# Allegro board pc049a_toplevel_40_a16-6_v2.brd
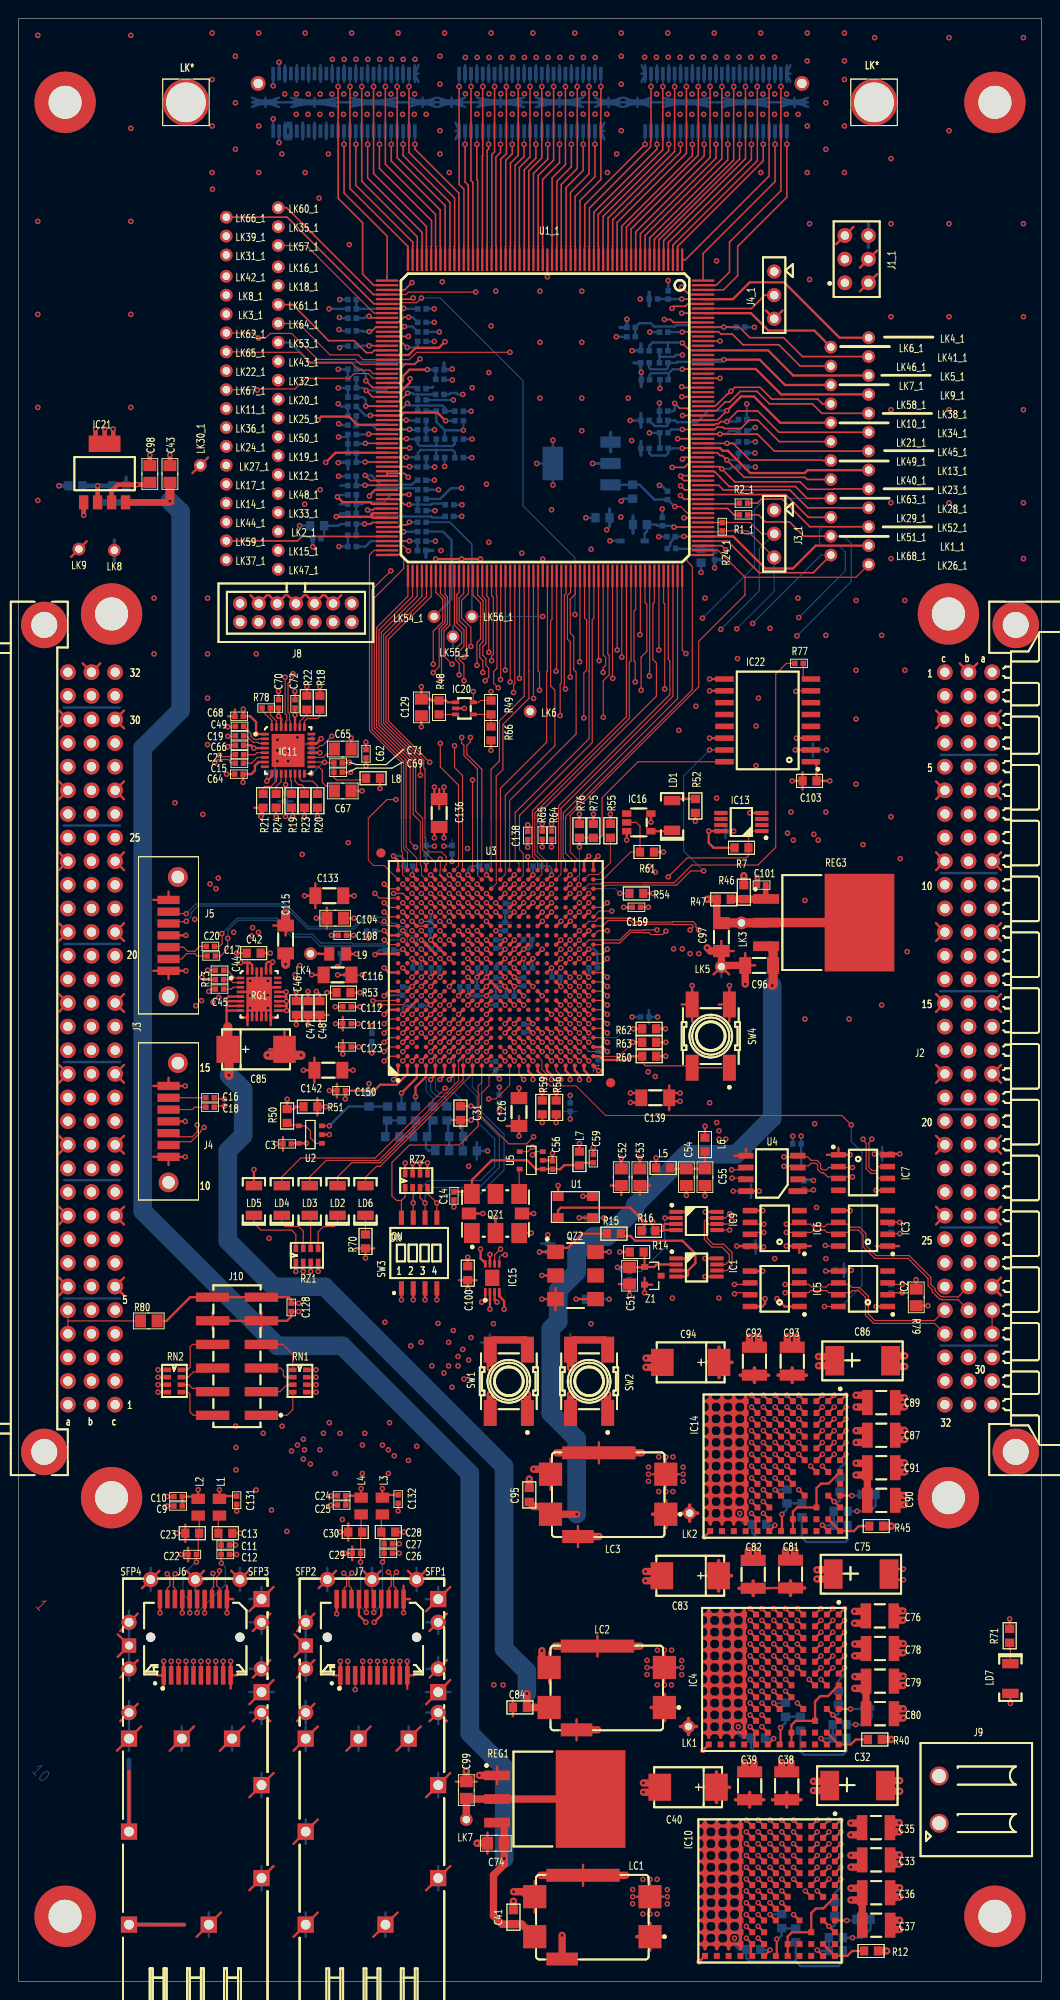
[diagram p0: board, top side]
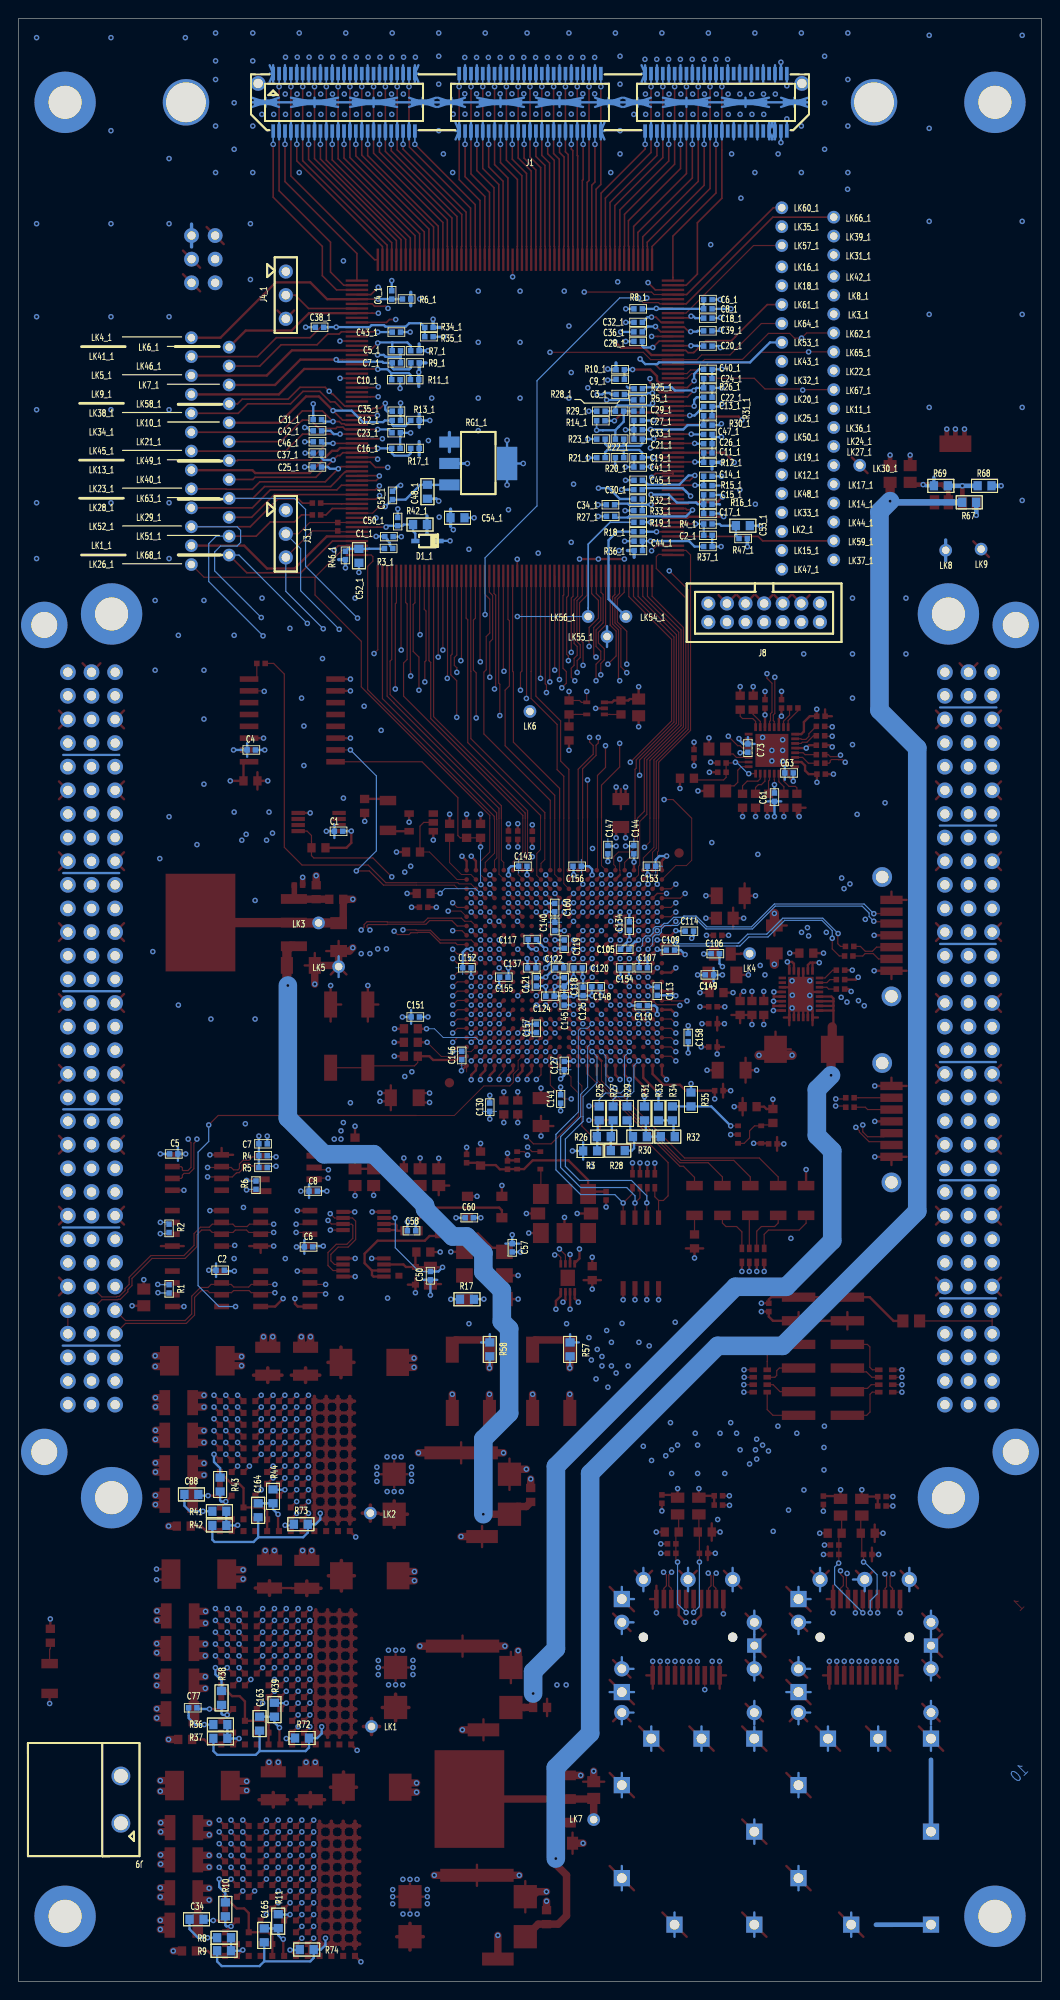
[diagram p1: board, bottom side, seen from below]

Outline 110 x 211 mm; copper layers: TOP, L2, L3, L4, L5, L6, L7, L8, L9, BOTTOM. Coordinates in mm from the lower left corner of the outline.
Outline path: 0,211 110,211 110,0 0,0 0,211

## Design rules (mm)
net group CLK_125M_PLLREF: nets CLK_125M_PLLREF_N CLK_125M_PLLREF_P
net group FPGA_PLL_REF_CLK101: nets FPGA_PLL_REF_CLK101_N FPGA_PLL_REF_CLK101_P
net group FPGA_PLL_REF_CLK123: nets FPGA_PLL_REF_CLK123_N FPGA_PLL_REF_CLK123_P
net group LVDS_DLEFT0: nets LVDS_DLEFT_N<0> LVDS_DLEFT_P<0>
net group LVDS_DLEFT1: nets LVDS_DLEFT_N<1> LVDS_DLEFT_P<1>
net group LVDS_DLEFT2: nets LVDS_DLEFT_N<2> LVDS_DLEFT_P<2>
net group LVDS_DLEFT3: nets LVDS_DLEFT_N<3> LVDS_DLEFT_P<3>
net group LVDS_DLEFT4: nets LVDS_DLEFT_N<4> LVDS_DLEFT_P<4>
net group LVDS_DLEFT5: nets LVDS_DLEFT_N<5> LVDS_DLEFT_P<5>
net group LVDS_DLEFT6: nets LVDS_DLEFT_N<6> LVDS_DLEFT_P<6>
net group LVDS_DLEFT7: nets LVDS_DLEFT_N<7> LVDS_DLEFT_P<7>
net group LVDS_DLEFT8: nets LVDS_DLEFT_N<8> LVDS_DLEFT_P<8>
net group LVDS_DLEFT9: nets LVDS_DLEFT_N<9> LVDS_DLEFT_P<9>
net group LVDS_DLEFT10: nets LVDS_DLEFT_N<10> LVDS_DLEFT_P<10>
net group LVDS_DLEFT11: nets LVDS_DLEFT_N<11> LVDS_DLEFT_P<11>
net group LVDS_DLEFT12: nets LVDS_DLEFT_N<12> LVDS_DLEFT_P<12>
net group LVDS_DLEFT13: nets LVDS_DLEFT_N<13> LVDS_DLEFT_P<13>
net group LVDS_DLEFT14: nets LVDS_DLEFT_N<14> LVDS_DLEFT_P<14>
net group LVDS_DLEFT15: nets LVDS_DLEFT_N<15> LVDS_DLEFT_P<15>
net group LVDS_DLEFT_CLK: nets LVDS_DLEFT_CLK_N LVDS_DLEFT_CLK_P
net group LVDS_DRIGHT0: nets LVDS_DRIGHT_N<0> LVDS_DRIGHT_P<0>
net group LVDS_DRIGHT1: nets LVDS_DRIGHT_N<1> LVDS_DRIGHT_P<1>
net group LVDS_DRIGHT2: nets LVDS_DRIGHT_N<2> LVDS_DRIGHT_P<2>
net group LVDS_DRIGHT3: nets LVDS_DRIGHT_N<3> LVDS_DRIGHT_P<3>
net group LVDS_DRIGHT4: nets LVDS_DRIGHT_N<4> LVDS_DRIGHT_P<4>
net group LVDS_DRIGHT5: nets LVDS_DRIGHT_N<5> LVDS_DRIGHT_P<5>
net group LVDS_DRIGHT6: nets LVDS_DRIGHT_N<6> LVDS_DRIGHT_P<6>
net group LVDS_DRIGHT7: nets LVDS_DRIGHT_N<7> LVDS_DRIGHT_P<7>
net group LVDS_DRIGHT8: nets LVDS_DRIGHT_N<8> LVDS_DRIGHT_P<8>
net group LVDS_DRIGHT9: nets LVDS_DRIGHT_N<9> LVDS_DRIGHT_P<9>
net group LVDS_DRIGHT10: nets LVDS_DRIGHT_N<10> LVDS_DRIGHT_P<10>
net group LVDS_DRIGHT11: nets LVDS_DRIGHT_N<11> LVDS_DRIGHT_P<11>
net group LVDS_DRIGHT12: nets LVDS_DRIGHT_N<12> LVDS_DRIGHT_P<12>
net group LVDS_DRIGHT13: nets LVDS_DRIGHT_N<13> LVDS_DRIGHT_P<13>
net group LVDS_DRIGHT14: nets LVDS_DRIGHT_N<14> LVDS_DRIGHT_P<14>
net group LVDS_DRIGHT15: nets LVDS_DRIGHT_N<15> LVDS_DRIGHT_P<15>
net group LVDS_DRIGHT_CLK: nets LVDS_DRIGHT_CLK_N LVDS_DRIGHT_CLK_P
net group LVDS_GCLK_FROM_FPGA: nets LVDS_GCLK_FROM_FPGA_N LVDS_GCLK_FROM_FPGA_P
net group LVDS_GCLK_TO_FPGA: nets LVDS_GCLK_TO_FPGA_N LVDS_GCLK_TO_FPGA_P
net group LVDS_GLOBALTRIG_FROM_FPGA: nets LVDS_GLOBALTRIG_FROM_FPGA_N LVDS_GLOBALTRIG_FROM_FPGA_P
net group LVDS_GLOBALTRIG_TO_FPGA: nets LVDS_GLOBALTRIG_TO_FPGA_N LVDS_GLOBALTRIG_TO_FPGA_P
net group LVDS_OTRIG_FROM_FPGA: nets LVDS_OTRIG_FROM_FPGA_N LVDS_OTRIG_FROM_FPGA_P
net group LVDS_OTRIG_TO_FPGA: nets LVDS_OTRIG_TO_FPGA_N LVDS_OTRIG_TO_FPGA_P
net group LVPECL_OTRIG_IN: nets LVPECL_OTRIG_IN_N LVPECL_OTRIG_IN_P
net group LVPECL_OTRIG_OUT: nets LVPECL_OTRIG_OUT_N LVPECL_OTRIG_OUT_P
net group MLVDS_GCLK: nets MLVDS_GCLK_N MLVDS_GCLK_P
net group MLVDS_GLOBALTRIG: nets MLVDS_GLOBALTRIG_N MLVDS_GLOBALTRIG_P
net group OR: nets OR<0> OR<1>
net group SATA_MRX: nets SATA_MRX_N SATA_MRX_P
net group SATA_MTX: nets SATA_MTX_N SATA_MTX_P
net group SATA_SRX: nets SATA_SRX_N SATA_SRX_P
net group SATA_STX: nets SATA_STX_N SATA_STX_P
net group SFP0_RX: nets SFP0_RX_N SFP0_RX_P
net group SFP0_TX: nets SFP0_TX_N SFP0_TX_P
net group SFP1_RX: nets SFP1_RX_N SFP1_RX_P
net group SFP1_TX: nets SFP1_TX_N SFP1_TX_P
net group SFP_CLK: nets SFP_CLK_N SFP_CLK_P
net group SFP_LOS: nets SFP0_LOS SFP1_LOS
net group SFP_MOD_DEF0: nets SFP0_MOD_DEF0 SFP1_MOD_DEF0
net group SFP_MOD_DEF1: nets SFP0_MOD_DEF1 SFP1_MOD_DEF1
net group SFP_MODE_DEF2: nets SFP0_MOD_DEF2 SFP1_MOD_DEF2
net group SFP_RATE_SELECT: nets SFP0_RATE_SELECT SFP1_RATE_SELECT
net group SFP_TX_DISABLE: nets SFP0_TX_DISABLE SFP1_TX_DISABLE
net group SFP_TX_FAULT: nets SFP0_TX_FAULT SFP1_TX_FAULT
net group SI57X_CLK: nets SI57X_CLK_N SI57X_CLK_P
net group ANALOG_TO_MAROC: nets ANALOG_TO_MAROC<0> ANALOG_TO_MAROC<1> ANALOG_TO_MAROC<2> ANALOG_TO_MAROC<3> ANALOG_TO_MAROC<4> ANALOG_TO_MAROC<5> ANALOG_TO_MAROC<6> ANALOG_TO_MAROC<7> ANALOG_TO_MAROC<8> ANALOG_TO_MAROC<9> ANALOG_TO_MAROC<10> ANALOG_TO_MAROC<11> ANALOG_TO_MAROC<12> ANALOG_TO_MAROC<13> ANALOG_TO_MAROC<14> ANALOG_TO_MAROC<15> ANALOG_TO_MAROC<16> ANALOG_TO_MAROC<17> ANALOG_TO_MAROC<18> ANALOG_TO_MAROC<19> ANALOG_TO_MAROC<20> ANALOG_TO_MAROC<21> ANALOG_TO_MAROC<22> ANALOG_TO_MAROC<23> ANALOG_TO_MAROC<24> ANALOG_TO_MAROC<25> ANALOG_TO_MAROC<26> ANALOG_TO_MAROC<27> ANALOG_TO_MAROC<28> ANALOG_TO_MAROC<29> ANALOG_TO_MAROC<30> ANALOG_TO_MAROC<31> ANALOG_TO_MAROC<32> ANALOG_TO_MAROC<33> ANALOG_TO_MAROC<34> ANALOG_TO_MAROC<35> ANALOG_TO_MAROC<36> ANALOG_TO_MAROC<37> ANALOG_TO_MAROC<38> ANALOG_TO_MAROC<39> ANALOG_TO_MAROC<40> ANALOG_TO_MAROC<41> ANALOG_TO_MAROC<42> ANALOG_TO_MAROC<43> ANALOG_TO_MAROC<44> ANALOG_TO_MAROC<45> ANALOG_TO_MAROC<46> ANALOG_TO_MAROC<47> ANALOG_TO_MAROC<48> ANALOG_TO_MAROC<49> ANALOG_TO_MAROC<50> ANALOG_TO_MAROC<51> ANALOG_TO_MAROC<52> ANALOG_TO_MAROC<53> ANALOG_TO_MAROC<54> ANALOG_TO_MAROC<55> ANALOG_TO_MAROC<56> ANALOG_TO_MAROC<57> ANALOG_TO_MAROC<58> ANALOG_TO_MAROC<59> ANALOG_TO_MAROC<60> ANALOG_TO_MAROC<61> ANALOG_TO_MAROC<62> ANALOG_TO_MAROC<63>
net group DIG_CTEST: nets DIG_CTEST<0> DIG_CTEST<1> DIG_CTEST<2> DIG_CTEST<3> DIG_CTEST<4> DIG_CTEST<5>
net group DIP_SWITCH: nets DIP_SWITCH<0> DIP_SWITCH<1> DIP_SWITCH<2> DIP_SWITCH<3>
net group FPGA_GPIO: nets FPGA_GPIO<0> FPGA_GPIO<1> FPGA_GPIO<2> FPGA_GPIO<3> FPGA_GPIO<4> FPGA_GPIO<5> FPGA_GPIO<6> FPGA_GPIO<7>
net group FPGA_LEDS: nets FPGA_LEDS<0> FPGA_LEDS<1> FPGA_LEDS<2> FPGA_LEDS<3> FPGA_LEDS<4>
net group SUM: nets SUM<1>_1 SUM<2>_1 SUM<3>_1 SUM<4>_1 SUM<5>_1 SUM<6>_1 SUM<7>_1 SUM<8>_1
net group TRIG: nets TRIG<0> TRIG<1> TRIG<2> TRIG<3> TRIG<4> TRIG<5> TRIG<6> TRIG<7> TRIG<8> TRIG<9> TRIG<10> TRIG<11> TRIG<12> TRIG<13> TRIG<14> TRIG<15> TRIG<16> TRIG<17> TRIG<18> TRIG<19> TRIG<20> TRIG<21> TRIG<22> TRIG<23> TRIG<24> TRIG<25> TRIG<26> TRIG<27> TRIG<28> TRIG<29> TRIG<30> TRIG<31> TRIG<32> TRIG<33> TRIG<34> TRIG<35> TRIG<36> TRIG<37> TRIG<38> TRIG<39> TRIG<40> TRIG<41> TRIG<42> TRIG<43> TRIG<44> TRIG<45> TRIG<46> TRIG<47> TRIG<48> TRIG<49> TRIG<50> TRIG<51> TRIG<52> TRIG<53> TRIG<54> TRIG<55> TRIG<56> TRIG<57> TRIG<58> TRIG<59> TRIG<60> TRIG<61> TRIG<62> TRIG<63>
net group UNNAMED_9_CAPCERSMDCL2_I82_B: nets UNNAMED_9_CAPCERSMDCL2_I82_B<0>
net group UNNAMED_9_LTM4606_I72_DRVCC: nets UNNAMED_9_LTM4606_I72_DRVCC<0>
net group UNNAMED_11_CAPCERSMDCL2_I82_B: nets UNNAMED_11_CAPCERSMDCL2_I82_<0>
net group UNNAMED_11_LTM4606_I72_DRVCC: nets UNNAMED_11_LTM4606_I72_DRVCC<0>
nets with their own width: min track width 0.254; nets UNNAMED_9_CAPCERSMDCL2_I55_B UNNAMED_9_CAPCERSMDCL2_I57_B

## Placement (name value [footprint] x y rotation side)
C1  100nF  [C0402]  75.59 123.64 180 bottom
C1_1  100nF  [C0402]  70.18 155.31 180 bottom
C2  100nF  [C0402]  88.32 76.45 180 bottom
C2_1  100nF  [C0402]  35.86 155.45 0 bottom
C3  1uF  [C0402]  28.88 90.03 0 top
C3_1  100nF  [C0402]  45.29 170.6 180 bottom
C4  100nF  [C0402]  84.97 132.38 180 bottom
C4_1  100nF  [C0402]  69.87 181.3 270 bottom
C5  100nF  [C0402]  93.32 88.95 0 bottom
C5_1  100nF  [C0402]  69.37 175.3 0 bottom
C6  100nF  [C0402]  78.82 78.95 180 bottom
C6_1  100nF  [C0402]  35.87 180.8 0 bottom
C7  100nF  [C0402]  83.71 90.04 0 bottom
C7_1  100nF  [C0402]  69.37 173.99 0 bottom
C8  100nF  [C0402]  78.32 84.95 180 bottom
C8_1  100nF  [C0402]  35.87 179.8 0 bottom
C9  1uF  [C0402]  17.15 51.1 0 top
C9_1  100nF  [C0402]  45.3 172.22 180 bottom
C10  1uF  [C0402]  17.15 52.12 0 top
C10_1  100nF  [C0402]  69.42 172.19 0 bottom
C11  100nF  [C0402]  22.23 46.91 180 top
C11_1  100nF  [C0402]  35.87 164.3 0 bottom
C12  1uF  [C0402]  22.23 45.89 180 top
C12_1  100nF  [C0402]  69.37 167.8 0 bottom
C13  22uF  [C0603]  22.23 48.18 180 top
C13_1  100nF  [C0402]  35.87 169.3 0 bottom
C14  100nF  [C0402]  46.82 84.45 90 top
C14_1  100nF  [C0402]  35.87 161.8 0 bottom
C15  100nF  [C0402]  23.74 130.96 180 top
C15_1  100nF  [C0402]  35.87 159.8 0 bottom
C16  100nF  [C0402]  20.59 94.99 0 top
C16_1  100nF  [C0402]  69.41 164.8 0 bottom
C17  100nF  [C0402]  20.72 110.23 0 top
C17_1  100nF  [C0402]  35.87 157.8 0 bottom
C18  100nF  [C0402]  20.59 93.97 0 top
C18_1  100nF  [C0402]  35.87 178.8 0 bottom
C19  100nF  [C0402]  23.76 133.91 180 top
C19_1  100nF  [C0402]  43.37 163.8 180 bottom
C20  100nF  [C0402]  20.63 111.26 0 top
C20_1  100nF  [C0402]  35.87 175.8 0 bottom
C21  100nF  [C0402]  23.76 131.87 180 top
C21_1  100nF  [C0402]  43.37 165.8 180 bottom
C22  100nF  [C0402]  18.68 45.89 0 top
C22_1  100nF  [C0402]  35.87 170.3 0 bottom
C23  22uF  [C0603]  18.68 48.18 0 top
C23_1  100nF  [C0402]  69.39 166.48 0 bottom
C24  1uF  [C0402]  34.74 52.21 0 top
C24_1  100nF  [C0402]  35.87 172.3 0 bottom
C25  1uF  [C0402]  34.74 51.21 0 top
C25_1  100nF  [C0402]  77.87 162.8 180 bottom
C26  100nF  [C0402]  39.76 46.02 180 top
C26_1  100nF  [C0402]  35.87 165.3 0 bottom
C27  1uF  [C0402]  39.76 47.04 180 top
C27_1  100nF  [C0402]  43.37 167.8 180 bottom
C28  22uF  [C0603]  39.76 48.31 180 top
C28_1  100nF  [C0402]  43.37 176.3 180 bottom
C29  100nF  [C0402]  36.33 46.02 0 top
C29_1  100nF  [C0402]  43.37 168.8 0 bottom
C30  22uF  [C0603]  36.2 48.31 0 top
C30_1  100nF  [C0402]  43.37 160.36 180 bottom
C31  100nF  [C0603]  47.52 93.34 270 top
C31_1  100nF  [C0402]  77.87 167.9 180 bottom
C32  150uF  [C7343POL]  87.23 21.05 0 top
C32_1  100nF  [C0402]  43.37 178.34 180 bottom
C33  10uF  [CAPC3225X279N]  92.23 13.07 180 top
C33_1  100nF  [C0402]  43.37 166.8 180 bottom
C34  XX  [C0603]  90.86 6.68 180 bottom
C34_1  100nF  [C0402]  46.35 158.74 180 bottom
C35  10uF  [CAPC3225X279N]  92.21 16.53 180 top
C35_1  100nF  [C0402]  69.37 168.8 0 bottom
C36  10uF  [CAPC3225X279N]  92.23 9.53 180 top
C36_1  100nF  [C0402]  43.38 177.32 180 bottom
C37  10uF  [CAPC3225X279N]  92.24 6.04 180 top
C37_1  100nF  [C0402]  77.87 164.3 180 bottom
C38  47uF  [C1210]  82.61 21.03 270 top
C38_1  100nF  [C0402]  77.64 177.82 180 bottom
C39  47uF  [C1210]  78.62 21.03 270 top
C39_1  100nF  [C0402]  35.88 177.43 0 bottom
C40  220uF  [POSCAP_D3]  75.06 20.87 180 top
C40_1  100nF  [C0402]  35.87 173.3 0 bottom
C41  2.2uF  [C0603]  53.22 6.9 270 top
C41_1  100nF  [C0402]  43.37 162.8 180 bottom
C42  2.2uF  [C0603]  25.28 110.54 180 top
C42_1  100nF  [C0402]  77.86 166.69 180 bottom
C43  22uF  [C0805]  16.27 162.05 270 top
C43_1  100nF  [C0402]  69.37 177.3 0 bottom
C44  1nF  [C0402]  21.61 108.71 0 top
C44_1  100nF  [C0402]  43.36 154.82 180 bottom
C45  100nF  [C0402]  21.61 106.67 0 top
C45_1  100nF  [C0402]  43.36 161.38 180 bottom
C46  2.2uF  [C0603]  29.86 104.64 90 top
C46_1  100nF  [C0402]  77.86 165.51 180 bottom
C47  4.7uF  [C0603]  31.13 104.64 90 top
C47_1  100nF  [C0402]  35.87 166.3 0 bottom
C48  10uF  [C0603]  32.4 104.64 90 top
C48_1  10uF  [C0603]  66.03 160.14 90 bottom
C49  100nF  [C0402]  23.76 134.92 180 top
C50  100nF  [C0402]  65.71 75.87 90 bottom
C50_1  100nF  [C0402]  69.23 156.93 270 bottom
C51  22uF  [C0805]  65.71 75.86 270 top
C51_1  100nF  [C0402]  69.79 159.74 270 bottom
C52  22uF  [C0805]  64.82 86.45 270 top
C52_1  10uF  [C0603]  73.4 153.25 90 bottom
C53  22uF  [C0805]  66.82 86.45 270 top
C53_1  10uF  [C0603]  32.11 156.49 0 bottom
C54  22uF  [C0805]  71.82 86.45 270 top
C54_1  10uF  [C0603]  62.79 157.34 0 bottom
C55  22uF  [C0805]  73.82 86.45 270 top
C56  100nF  [C0402]  57.42 87.75 270 top
C57  100nF  [C0402]  56.91 78.86 270 bottom
C58  100nF  [C0402]  67.74 80.69 180 bottom
C59  1uF  [C0402]  61.82 88.45 270 top
C60  100nF  [C0402]  61.52 82.09 0 bottom
C61  100nF  [C0402]  28.71 127.3 90 bottom
C62  100nF  [C0402]  37.36 131.97 270 top
C63  100nF  [C0402]  27.14 129.91 180 bottom
C64  100nF  [C0402]  23.69 129.78 0 top
C65  22uF  [C0805]  34.86 132.48 180 top
C66  100nF  [C0402]  23.76 132.89 0 top
C67  22uF  [C0805]  34.86 127.97 180 top
C68  100nF  [C0402]  23.71 136 0 top
C69  100nF  [C0402]  34.36 129.98 180 top
C70  100nF  [C0402]  27.95 137.33 270 top
C71  1uF  [C0402]  34.36 130.98 180 top
C72  100nF  [C0402]  29.73 137.33 270 top
C73  100nF  [C0402]  31.57 132.57 270 bottom
C74  22uF  [C0805]  51.33 14.85 0 top
C75  150uF  [C7343POL]  87.61 43.79 0 top
C76  10uF  [CAPC3225X279N]  92.62 39.29 180 top
C77  100nF  [C0402]  91.27 29.41 180 bottom
C78  10uF  [CAPC3225X279N]  92.64 35.78 180 top
C79  10uF  [CAPC3225X279N]  92.64 32.28 180 top
C80  10uF  [CAPC3225X279N]  92.64 28.77 180 top
C81  47uF  [C1210]  83.02 43.79 270 top
C82  47uF  [C1210]  79 43.76 270 top
C83  220uF  [POSCAP_D3]  75.29 43.61 180 top
C84  2.2uF  [C0603]  53.91 29.45 0 top
C85  220uF  [POSCAP_D3]  22.5 100.2 0 top
C86  150uF  [C7343POL]  87.78 66.72 0 top
C87  10uF  [CAPC3225X279N]  92.78 58.72 180 top
C88  XX  [C0603]  91.42 52.35 180 bottom
C89  10uF  [CAPC3225X279N]  92.78 62.22 180 top
C90  10uF  [CAPC3225X279N]  92.78 51.72 180 top
C91  10uF  [CAPC3225X279N]  92.78 55.22 180 top
C92  47uF  [C1210]  79.14 66.67 270 top
C93  47uF  [C1210]  83.2 66.67 270 top
C94  220uF  [POSCAP_D3]  75.33 66.54 180 top
C95  2.2uF  [C0603]  54.92 52.29 270 top
C96  100uF  [C1206]  79.65 109.21 0 top
C97  100uF  [C1206]  75.58 112.26 90 top
C98  22uF  [C0805]  14.11 162.05 270 top
C99  22uF  [C0805]  48.15 20.57 270 top
C100  100nF  [C0603]  48.31 76.13 270 top
C101  1uF  [C0402]  79.9 117.85 0 top
C103  100nF  [C0603]  85.06 129.06 180 top
C104  22uF  [C0805]  34.05 114.29 0 top
C105  100nF  [C0402]  44.82 110.95 180 bottom
C106  100nF  [C0402]  35.07 110.48 0 bottom
C107  1uF  [C0402]  42.82 108.96 0 bottom
C108  100nF  [C0402]  34.82 112.45 0 top
C109  100nF  [C0402]  39.89 110.87 0 bottom
C110  1uF  [C0402]  42.82 104.9 0 bottom
C111  100nF  [C0402]  35.32 102.95 0 top
C112  100nF  [C0402]  35.32 104.77 0 top
C113  100nF  [C0402]  41.32 106.45 90 bottom
C114  100nF  [C0402]  37.86 112.9 0 bottom
C115  100uF  [C1206]  28.72 112.01 270 top
C116  100uF  [C1206]  34.31 108.2 180 top
C117  4.7uF  [C0402]  54.75 112.01 0 bottom
C118  4.7uF  [C0402]  51.32 107.45 90 bottom
C119  4.7uF  [C0402]  51.33 111.5 270 bottom
C120  100nF  [C0402]  49.82 108.95 180 bottom
C121  100nF  [C0402]  54.32 107.45 270 bottom
C122  100nF  [C0402]  51.82 108.95 180 bottom
C123  100nF  [C0402]  35.32 100.45 0 top
C124  100nF  [C0402]  52.85 105.91 0 bottom
C125  100nF  [C0402]  49.29 106.42 90 bottom
C126  100uF  [C1206]  53.82 93.45 90 top
C127  4.7uF  [C0402]  51.32 98.45 90 bottom
C128  100nF  [C0402]  29.32 72.45 90 top
C129  22uF  [C0805]  43.32 136.95 90 top
C130  100nF  [C0402]  59.33 93.97 90 bottom
C131  100nF  [C0402]  23.45 51.72 90 top
C132  100nF  [C0402]  40.82 51.85 90 top
C133  100uF  [C1206]  33.42 116.71 0 top
C134  100nF  [C0402]  44.32 113.45 90 bottom
C136  100uF  [C1206]  45.23 125.6 270 top
C137  100nF  [C0402]  54.82 108.95 0 bottom
C138  2.2uF  [C0402]  54.75 123.18 270 top
C139  100uF  [C1206]  68.47 94.99 180 top
C140  100nF  [C0402]  52.33 113.41 270 bottom
C141  100nF  [C0402]  51.71 94.86 90 bottom
C142  100uF  [C1206]  33.32 97.95 0 top
C143  100nF  [C0402]  55.77 119.88 180 bottom
C144  100nF  [C0402]  43.83 121.66 270 bottom
C145  4.7uF  [C0402]  51.33 105.41 270 bottom
C146  100nF  [C0402]  62.34 99.54 90 bottom
C147  100nF  [C0402]  46.63 121.66 270 bottom
C148  4.7uF  [C0402]  47.9 106.93 180 bottom
C149  100nF  [C0402]  35.7 108.2 0 bottom
C150  100nF  [C0402]  34.69 95.75 0 top
C151  4.7uF  [C0402]  67.34 103.67 180 bottom
C152  100nF  [C0402]  61.79 108.97 180 bottom
C153  4.7uF  [C0402]  41.93 119.88 0 bottom
C154  100nF  [C0402]  44.82 108.95 0 bottom
C155  4.7uF  [C0402]  57.82 107.95 180 bottom
C156  100nF  [C0402]  49.93 119.88 0 bottom
C157  4.7uF  [C0402]  54.32 102.45 90 bottom
C158  100nF  [C0402]  37.99 101.47 270 bottom
C159  100nF  [C0402]  66.44 115.47 180 top
C160  100nF  [C0402]  52.34 115.44 90 bottom
C163  100pF  [C0603]  84.08 27.71 270 bottom
C164  100pF  [C0603]  84.24 50.64 270 bottom
C165  100pF  [C0603]  83.58 4.95 270 bottom
D1_1  -  [SOD323_INV]  66.03 154.84 180 bottom
IC1  -  [SOP65P490X95-8N]  72.91 76.74 0 top
IC2  -  [SOIC127P600X175-8N]  90.82 74.45 180 top
IC3  -  [SOIC127P600X175-8N]  90.82 80.95 180 top
IC4  -  [LGA133S127P12X12_05-08-1766]  81.21 32.46 270 top
IC5  -  [SOIC127P600X175-8N]  81.32 74.45 180 top
IC6  -  [SOIC127P600X175-8N]  81.32 80.95 180 top
IC7  -  [SOIC127P600X175-8N]  90.82 86.95 0 top
IC9  -  [SOP65P490X95-8N]  72.91 81.74 0 top
IC10  -  [LGA133S127P12X12_05-08-1766]  80.81 9.72 270 top
IC11  -  [QFN50P500X500X100-33N-S355]  28.99 132.33 0 top
IC13  -  [SOP65P490X110-8N]  77.73 124.63 180 top
IC14  -  [LGA133S127P12X12_05-08-1766]  81.37 55.39 270 top
IC15  -  [SON50P300X200X100-9N-R175X155]  50.94 75.63 90 top
IC16  -  [SOT23_5]  65.4 125.54 270 top
IC20  -  [SC70]  47 137.5 270 top
IC21  -  [SOT223_5]  7 159 0 top
IC22  -  [SOIC127P1030X265-16N]  80.56 135.56 180 top
J1  -  [CON150_QTSDA]  82.62 205.09 90 bottom
J1_1  -  [SAMTEC_SSW-103-01-G-D]  90.13 185.14 270 top
J2  -  [HARTING_0903196X921]  104.7 140.74 0 top
J3  -  [HARTING_09732966801]  5.3 62 180 top
J3_1  -  [CONHE13D3X1M]  81.26 158.16 270 top
J4  -  [SK_SATA_SMD_STR]  16.13 96.26 0 top
J4_1  -  [CONHE13D3X1M]  81.26 183.81 270 top
J5  -  [SK_SATA_SMD_STR]  16.13 116.26 0 top
J6  -  [TYCO_1367073]  19 37 90 top
J7  -  [TYCO_1367073]  38 37 90 top
J8  -  [CON14MD_2MM]  35.82 148.13 270 top
J9  -  [CON2MC_508]  99 17 180 top
J10  -  [SAMTEC_TSM-106-01-X-DV]  23.49 69.75 90 top
L1  -  [INDC2012X90N]  21.6 50.97 270 top
L2  -  [INDC2012X90N]  19.31 50.97 90 top
L3  -  [INDC2012X90N]  39.12 51.1 270 top
L4  -  [INDC2012X90N]  36.84 51.1 90 top
L5  -  [C0603]  69.32 87.45 0 top
L6  -  [C0603]  73.82 89.95 90 top
L7  -  [C0603]  60.32 88.45 90 top
L8  -  [C0603]  38.12 129.34 0 top
L9  -  [INDC2012X90N]  34.32 110.45 180 top
LC1  -  [MURATA_BNX02]  61.71 6.9 180 top
LC2  -  [MURATA_BNX02]  63.26 31.54 180 top
LC3  -  [MURATA_BNX02]  63.41 52.32 180 top
LD1  Red  [D1206]  70.28 126.94 270 top
LD2  Red  [D1206]  34.31 85.55 270 top
LD3  Green  [D1206]  31.31 85.55 270 top
LD4  Yellow  [D1206]  28.31 85.55 270 top
LD5  Red  [D1206]  25.31 85.55 270 top
LD6  Yellow  [D1206]  37.31 85.55 270 top
LD7  Yellow  [D1206]  106.66 30.96 90 top
LK1  -  [1-HOLE_0-8P]  72.04 27.4 0 top
LK1_1  -  [1-HOLE_0-8P]  91.42 154.35 0 top
LK2  -  [1-HOLE_0-8P]  72.17 50.34 0 top
LK2_1  -  [1-HOLE_0-8P]  27.92 155.87 0 top
LK3  -  [1-HOLE_0-8P]  77.74 113.79 0 top
LK3_1  -  [1-HOLE_0-8P]  22.33 179.24 0 top
LK4  -  [1-HOLE_0-8P]  31.39 110.48 0 top
LK4_1  -  [1-HOLE_0-8P]  91.42 176.7 0 top
LK5  -  [1-HOLE_0-8P]  75.58 109.09 0 top
LK5_1  -  [1-HOLE_0-8P]  91.42 172.63 0 top
LK6  -  [1-HOLE_0-8P]  55.01 136.52 0 top
LK6_1  -  [1-HOLE_0-8P]  87.36 175.68 0 top
LK7  -  [1-HOLE_0-8P]  48.15 17.39 0 top
LK7_1  -  [1-HOLE_0-8P]  87.36 171.62 0 top
LK8  -  [1-HOLE_0-8P]  10.3 153.84 0 top
LK8_1  -  [1-HOLE_0-8P]  22.33 181.27 0 top
LK9  -  [1-HOLE_0-8P]  6.49 153.97 0 top
LK9_1  -  [1-HOLE_0-8P]  91.42 170.6 0 top
LK10_1  -  [1-HOLE_0-8P]  87.36 167.55 0 top
LK11_1  -  [1-HOLE_0-8P]  22.33 169.08 0 top
LK12_1  -  [1-HOLE_0-8P]  27.92 161.97 0 top
LK13_1  -  [1-HOLE_0-8P]  91.42 162.47 0 top
LK14_1  -  [1-HOLE_0-8P]  22.33 158.92 0 top
LK15_1  -  [1-HOLE_0-8P]  27.92 153.84 0 top
LK16_1  -  [1-HOLE_0-8P]  27.92 184.32 0 top
LK17_1  -  [1-HOLE_0-8P]  22.33 160.95 0 top
LK18_1  -  [1-HOLE_0-8P]  27.92 182.29 0 top
LK19_1  -  [1-HOLE_0-8P]  27.92 164 0 top
LK20_1  -  [1-HOLE_0-8P]  27.92 170.09 0 top
LK21_1  -  [1-HOLE_0-8P]  87.36 165.52 0 top
LK22_1  -  [1-HOLE_0-8P]  22.33 173.14 0 top
LK23_1  -  [1-HOLE_0-8P]  91.42 160.44 0 top
LK24_1  -  [1-HOLE_0-8P]  22.33 165.01 0 top
LK25_1  -  [1-HOLE_0-8P]  27.92 168.06 0 top
LK26_1  -  [1-HOLE_0-8P]  91.42 152.31 0 top
LK27_1  -  [1-HOLE_0-8P]  22.33 162.98 0 top
LK28_1  -  [1-HOLE_0-8P]  91.42 158.41 0 top
LK29_1  -  [1-HOLE_0-8P]  87.36 157.39 0 top
LK30_1  -  [1-HOLE_0-8P]  19.54 162.98 0 top
LK31_1  -  [1-HOLE_0-8P]  22.33 185.59 0 top
LK32_1  -  [1-HOLE_0-8P]  27.92 172.13 0 top
LK33_1  -  [1-HOLE_0-8P]  27.92 157.9 0 top
LK34_1  -  [1-HOLE_0-8P]  91.42 166.54 0 top
LK35_1  -  [1-HOLE_0-8P]  27.92 188.64 0 top
LK36_1  -  [1-HOLE_0-8P]  22.33 167.05 0 top
LK37_1  -  [1-HOLE_0-8P]  22.33 152.82 0 top
LK38_1  -  [1-HOLE_0-8P]  91.42 168.57 0 top
LK39_1  -  [1-HOLE_0-8P]  22.33 187.62 0 top
LK40_1  -  [1-HOLE_0-8P]  87.36 161.46 0 top
LK41_1  -  [1-HOLE_0-8P]  91.42 174.67 0 top
LK42_1  -  [1-HOLE_0-8P]  22.33 183.3 0 top
LK43_1  -  [1-HOLE_0-8P]  27.92 174.16 0 top
LK44_1  -  [1-HOLE_0-8P]  22.33 156.89 0 top
LK45_1  -  [1-HOLE_0-8P]  91.42 164.51 0 top
LK46_1  -  [1-HOLE_0-8P]  87.36 173.65 0 top
LK47_1  -  [1-HOLE_0-8P]  27.92 151.81 0 top
LK48_1  -  [1-HOLE_0-8P]  27.92 159.93 0 top
LK49_1  -  [1-HOLE_0-8P]  87.36 163.49 0 top
LK50_1  -  [1-HOLE_0-8P]  27.92 166.03 0 top
LK51_1  -  [1-HOLE_0-8P]  87.36 155.36 0 top
LK52_1  -  [1-HOLE_0-8P]  91.42 156.38 0 top
LK53_1  -  [1-HOLE_0-8P]  27.92 176.19 0 top
LK54_1  -  [1-HOLE_0-8P]  44.69 146.73 0 top
LK55_1  -  [1-HOLE_0-8P]  46.72 144.57 0 top
LK56_1  -  [1-HOLE_0-8P]  48.75 146.73 0 top
LK57_1  -  [1-HOLE_0-8P]  27.92 186.6 0 top
LK58_1  -  [1-HOLE_0-8P]  87.36 169.59 0 top
LK59_1  -  [1-HOLE_0-8P]  22.33 154.85 0 top
LK60_1  -  [1-HOLE_0-8P]  27.92 190.67 0 top
LK61_1  -  [1-HOLE_0-8P]  27.92 180.25 0 top
LK62_1  -  [1-HOLE_0-8P]  22.33 177.21 0 top
LK63_1  -  [1-HOLE_0-8P]  87.36 159.43 0 top
LK64_1  -  [1-HOLE_0-8P]  27.92 178.22 0 top
LK65_1  -  [1-HOLE_0-8P]  22.33 175.17 0 top
LK66_1  -  [1-HOLE_0-8P]  22.33 189.65 0 top
LK67_1  -  [1-HOLE_0-8P]  22.33 171.11 0 top
LK68_1  -  [1-HOLE_0-8P]  87.36 153.33 0 top
LK*  -  [unnamed#3]  92 202 0 top
LK*#2  -  [unnamed#3]  18 202 0 top
NOREF  -  [unnamed]  100 147 0 top
NOREF#2  -  [#2]  0 0 90 top
NOREF#3  -  [unnamed]  100 52 0 top
NOREF#4  -  [unnamed]  10 52 0 top
NOREF#5  -  [#2]  0 211 0 top
NOREF#6  -  [#2]  0 0 90 top
NOREF#7  -  [unnamed]  5 202 0 top
NOREF#8  -  [unnamed]  10 147 0 top
NOREF#9  -  [unnamed]  105 202 0 top
NOREF#10  -  [unnamed]  5 7 0 top
NOREF#11  -  [unnamed]  105 7 0 top
NOREF#12  -  [#2]  0 0 0 top
QZ1  -  [OSC_SILABS_SI570]  51.29 82.55 0 top
QZ2  20.000MHz  [OSCSC254P490X696X180-6N]  59.9 75.89 0 top
R1  100  [C0402]  93.82 74.45 270 bottom
R1_1  51  [C0402]  77.96 157.65 0 top
R2  100  [C0402]  93.82 80.95 270 bottom
R2_1  51  [C0402]  77.96 158.92 0 top
R3  2.4k  [C0603]  48.53 89.28 180 bottom
R3_1  10  [C0402]  70.21 154.04 180 bottom
R4  51  [C0402]  83.71 88.77 180 bottom
R4_1  10  [C0402]  35.87 156.67 0 bottom
R5  51  [C0402]  83.71 87.5 180 bottom
R5_1  10  [C0402]  43.37 170.01 0 bottom
R6  100  [C0402]  84.47 85.59 270 bottom
R6_1  10  [C0402]  68.27 180.86 180 bottom
R7  4.7k  [C0603]  77.75 121.86 180 top
R7_1  10  [C0402]  67.37 175.3 180 bottom
R8  XX  [C0603]  87.9 4.69 180 bottom
R8_1  10  [C0402]  43.37 179.8 0 bottom
R9  XX  [C0603]  87.9 3.3 0 bottom
R9_1  10  [C0402]  67.36 173.99 180 bottom
R10  100k  [C0603]  87.77 7.74 270 bottom
R10_1  10  [C0402]  45.3 173.26 0 bottom
R11  9k  [C0603]  82.08 6.47 270 bottom
R11_1  10  [C0402]  67.41 172.19 180 bottom
R12  390k  [C0603]  91.68 3.27 180 top
R12_1  10  [C0402]  35.87 163.3 180 bottom
R13  47k  [C0402]  21.61 107.69 180 top
R13_1  10  [C0402]  67.37 167.8 180 bottom
R14  240  [C0603]  66.47 78.41 180 top
R14_1  100  [C0402]  47.39 167.77 0 bottom
R15  240  [C0603]  64.03 80.39 0 top
R15_1  10  [C0402]  35.87 160.8 180 bottom
R16  240  [C0603]  67.74 80.69 0 top
R16_1  10  [C0402]  35.87 158.8 180 bottom
R17  33  [C0603]  61.78 73.33 180 bottom
R17_1  100  [C0402]  67.37 164.8 180 bottom
R18  XX  [C0603]  32.39 137.46 270 top
R18_1  51  [C0402]  43.37 155.85 180 bottom
R19  XX  [C0603]  29.35 126.92 90 top
R19_1  51  [C0402]  43.37 156.86 180 bottom
R20  00  [C0603]  32.14 126.92 90 top
R20_1  XX  [C0402]  45.37 163.8 0 bottom
R21  00  [C0603]  26.3 126.92 90 top
R21_1  XX  [C0402]  47.37 163.8 180 bottom
R22  XX  [C0603]  31 137.46 270 top
R22_1  XX  [C0402]  45.37 165.8 0 bottom
R23  XX  [C0603]  30.74 126.92 90 top
R23_1  XX  [C0402]  47.37 165.8 180 bottom
R24  XX  [C0603]  27.7 126.92 90 top
R24_1  100  [C0402]  75.67 156.38 270 top
R25  2.4k  [C0603]  47.56 93.31 90 bottom
R25_1  XX  [C0402]  43.36 171.22 0 bottom
R26  1.2k  [C0603]  47.06 90.81 180 bottom
R26_1  XX  [C0402]  35.87 171.3 0 bottom
R27  2.4k  [C0603]  46.06 93.31 90 bottom
R27_1  1k  [C0402]  46.33 157.49 0 bottom
R28  1.2k  [C0603]  45.56 89.31 180 bottom
R28_1  XX  [C0402]  45.37 168.8 180 bottom
R29  2.4k  [C0603]  44.56 93.31 90 bottom
R29_1  XX  [C0402]  47.37 168.8 180 bottom
R30  1.2k  [C0603]  43.18 90.81 180 bottom
R30_1  XX  [C0402]  35.87 167.3 180 bottom
R31  2.4k  [C0603]  42.68 93.31 90 bottom
R31_1  XX  [C0402]  35.87 168.3 0 bottom
R32  1.2k  [C0603]  40.18 90.81 180 bottom
R32_1  XX  [C0402]  43.37 159.36 0 bottom
R33  2.4k  [C0603]  41.18 93.31 90 bottom
R33_1  XX  [C0402]  43.37 158.11 180 bottom
R34  1.2k  [C0603]  39.68 93.31 90 bottom
R34_1  XX  [C0402]  65.87 177.8 180 bottom
R35  2.4k  [C0603]  37.68 94.81 90 bottom
R35_1  XX  [C0402]  65.87 176.8 0 bottom
R36  XX  [C0603]  88.3 27.61 180 bottom
R36_1  XX  [C0402]  43.35 153.82 0 bottom
R37  XX  [C0603]  88.3 26.13 0 bottom
R37_1  XX  [C0402]  35.87 154.24 0 bottom
R38  100k  [C0603]  88.17 30.48 270 bottom
R39  40.2k  [C0603]  82.48 29.21 270 bottom
R40  390k  [C0603]  92.08 26.01 180 top
R41  XX  [C0603]  88.41 50.54 180 bottom
R42  XX  [C0603]  88.41 49.02 0 bottom
R42_1  82  [C0603]  66.83 156.61 180 bottom
R43  100k  [C0603]  88.32 53.41 270 bottom
R44  11k  [C0603]  82.64 52.14 270 bottom
R45  390k  [C0603]  92.24 48.94 180 top
R46  120  [C0603]  78 117.09 270 top
R46_1  3.3  [C0402]  74.85 153.29 90 bottom
R47  120  [C0603]  75.84 116.33 180 top
R47_1  3.3  [C0402]  32.08 155.11 0 bottom
R48  4.7k  [C0603]  45.22 136.95 270 top
R49  270k  [C0603]  50.8 136.95 90 top
R50  180  [C0603]  28.88 93.03 270 top
R51  120  [C0603]  31.38 94.03 180 top
R52  150  [C0603]  72.79 126.36 270 top
R53  51  [C0603]  34.94 106.29 180 top
R54  00  [C0603]  66.44 116.95 180 top
R55  00  [C0603]  63.64 123.69 270 top
R56  4.7k  [C0603]  57.82 93.95 270 top
R57  4.7k  [C0603]  50.69 67.94 270 bottom
R58  4.7k  [C0603]  59.33 67.94 270 bottom
R59  4.7k  [C0603]  56.32 93.95 270 top
R60  4.7k  [C0603]  67.82 99.45 0 top
R61  330  [C0603]  67.58 121.41 0 top
R62  4.7k  [C0603]  67.81 102.41 0 top
R63  2.4k  [C0603]  67.82 100.95 0 top
R64  00  [C0402]  57.32 123.21 270 top
R65  00  [C0402]  56.32 123.21 270 top
R66  300k  [C0603]  50.8 134.15 90 top
R67  4.7k  [C0603]  7.76 159 180 bottom
R68  36k  [C0603]  6.11 160.78 0 bottom
R69  62k  [C0603]  10.81 160.78 0 bottom
R70  150  [C0603]  37.31 79.55 90 top
R71  3.3k  [C0603]  106.59 37.16 270 top
R72  100k  [C0603]  79.52 26.16 0 bottom
R73  100k  [C0603]  79.65 49.14 0 bottom
R74  100k  [C0603]  79.01 3.42 0 bottom
R75  100  [C0603]  61.82 123.68 90 top
R76  100  [C0603]  60.32 123.68 270 top
R77  33  [C0402]  83.93 141.68 180 top
R78  100  [C0402]  26.63 136.89 0 top
R79  00  [C0805]  96.54 73.53 90 top
R80  00  [C0805]  14 71 0 top
REG1  -  [TO254P1435X460-4N]  57.67 19.61 0 top
REG3  -  [TO254P1435X460-4N]  86.59 113.82 0 top
RG1  -  [QFN50P400X500X80-29N-R375X275]  25.87 106.12 0 top
RG1_1  -  [SOT223_4]  63.66 165.48 270 bottom
RN1  150  [ARC241_SO8]  29.49 65.75 270 top
RN2  150  [ARC241_SO8]  15.99 65.75 270 top
RZ1  150  [ARC241_SO8]  29.82 77.29 0 top
RZ2  4.7k  [ARC241_SO8]  41.58 85.32 0 top
SFP1  -  [TYCO_6367034-1]  38 37 90 top
SFP2  -  [TYCO_6367035-1]  38 37 90 top
SFP3  -  [TYCO_6367034-1]  19 37 90 top
SFP4  -  [TYCO_6367035-1]  19 37 90 top
SW1  -  [OMRON_B3SN-3012]  52.72 64.51 90 top
SW2  -  [OMRON_B3SN-3012]  61.36 64.51 90 top
SW3  -  [SW_TYCO_1571983-4]  43.08 78.3 90 top
SW4  -  [OMRON_B3SN-3012]  74.44 101.62 90 top
U1  -  [OSC_4PIN_53S]  59.87 83.24 90 top
U1_1  -  [PQFP240_050]  71.37 185.08 270 top
U2  -  [SOT23-5]  31.38 91.03 180 top
U3  -  [BGA484C100P22X22_2300X2300X260]  51.32 108.95 90 top
U4  -  [SOIC8]  83.82 84.95 90 top
U5  -  [SOT23-5]  55.13 88.26 180 top
Z1  -  [SOT23]  68.21 75.86 0 top

## Library data of the parts
C1 C1_1 C2 C2_1 C3_1 C4 C4_1 C5 C5_1 C6 C6_1 C7 C7_1 C8 C8_1 C9_1 C10_1 C11 C11_1 C12_1 C13_1 C14 C14_1 C15 C15_1 C16 C16_1 C17 C17_1 C18 C18_1 C19 C19_1 C20 C20_1 C21 C21_1 C22 C22_1 C23_1 C24_1 C25_1 C26 C26_1 C27_1 C28_1 C29 C29_1 C30_1 C31_1 C32_1 C33_1 C34_1 C35_1 C36_1 C37_1 C38_1 C39_1 C40_1 C41_1 C42_1 C43_1 C44_1 C45 C45_1 C46_1 C47_1 C49 C50 C50_1 C51_1 C56-C58 C60-C64 C66 C68-C70 C72 C73 C77 C105 C106 C108 C109 C111-C114 C120-C125 C128 C130-C132 C134 C137 C140 C141 C143 C144 C146 C147 C149 C150 C152 C154 C156 C158-C160 = CAPCERSMDCL2: part number: CAPCERSMDCL2_0402-100NF,16V_GEN; tolerance: 10%
C3 C9 C10 C12 C24 C25 C27 C59 C71 C101 C107 C110 = CAPCERSMDCL2: part number: CAPCERSMDCL2_0402-1UF,16V; tolerance: 10%
C13 C23 C28 C30 = CAPCERSMDCL2: part number: CAPCERSMDCL2_0603-22UF,4V; tolerance: 20%
C31 C100 C103 = CAPCERSMDCL2: part number: CAPCERSMDCL2_0603-100NF,16V; tolerance: 10%
C32 C75 C86 = ELCAPTAN: part number: ELCAPTAN_SMD-150UF,20V
C33 C35-C37 C76 C78-C80 C87 C89-C91 = CAPCERSMDCL2: part number: CAPCERSMDCL2_1210-10UF,50V; tolerance: 10%
C34 C88 = CAPCERSMDCL2: part number: CAPCERSMDCL2_0603-XX,50V; tolerance: 10%
C38 C39 C81 C82 C92 C93 = CAPCERSMDCL2: part number: CAPCERSMDCL2_1210-47UF_X5R,6.3V; tolerance: 20%
C40 C83 C85 C94 = ELCAPTAN: part number: ELCAPTAN_SMD-220UF,6.3V
C41 C42 C46 C84 C95 = CAPCERSMDCL2: part number: CAPCERSMDCL2_0603-2.2UF,10V; tolerance: 10%
C43 C51-C55 C65 C67 C74 C98 C99 C104 C129 = CAPCERSMDCL2: part number: CAPCERSMDCL2_0805-22UF,6.3V; tolerance: 15%
C44 = CAPCERSMDCL2: part number: CAPCERSMDCL2_0402-1NF_X7R,50V; tolerance: 10%
C47 = CAPCERSMDCL2: part number: CAPCERSMDCL2_0603-4.7UF,6.3V_GEN; tolerance: 10%
C48 C48_1 C52_1 C53_1 C54_1 = CAPCERSMDCL2: part number: CAPCERSMDCL2_0603-10UF,6.3V; tolerance: 20%
C96 C97 C115 C116 C126 C133 C136 C139 C142 = CAPCERSMDCL2: part number: CAPCERSMDCL2_1206-100UF_X5R,6.3V; tolerance: 20%
C117-C119 C127 C145 C148 C151 C153 C155 C157 = CAPCERSMDCL2: part number: CAPCERSMDCL2_0402-4.7UF,4V; tolerance: 10%
C138 = CAPCERSMDCL2: part number: CAPCERSMDCL2_0402-2.2UF,6.3V; tolerance: 20%
C163-C165 = CAPCERSMDCL1: part number: CAPCERSMDCL1_0603-100PF,50V; tolerance: 5%
D1_1 = DIODE_CA: part number: DIODE_CA_SCHOTTKY-RB751V40T1
IC1 IC9 = AD5662: part number: AD5662BRMZ-1
IC2 IC3 = DS92001: part number: DS92001TMA
IC4 IC10 IC14 = LTM4606: part number: LTM4606EV#PBF
IC5-IC7 = DS90LV001: part number: DS90LV001TM
IC11 = CDCM61004: part number: CDCM61004RHB
IC13 = DS18B20: part number: DS18B20U+
IC15 = 24AA64: part number: 24AA64T-I/MC
IC16 = 74LVC1G06: part number: SN74LVC1G06DBVT
IC20 = TPS71701DCKRG4: part number: TPS71701DCKRG4_SC70-TEXAS INSTRUMENTS
IC21 = LP38692: part number: LP38692_SOT223-ADJ,TEXAS INSTRUMENTS
IC22 = S25FL128S_RESET_VIO: part number: S25FL128SAGMFIR01
J1 = CON150P: part number: CON150P-QTS75_03FDA
J1_1 = CON6P: part number: CON6P-SSW-103-01-G-D
J2 = CONABC96: part number: CONABC96-09 03 196 6921
J3 = CONABC96: part number: CONABC96-09 73 296 6801
J3_1 J4_1 = CON3P: part number: CON3P-SIL254D
J4 J5 = SK_SATA: part number: SK_SATA_SMD_STR-MOLEX
J6 J7 = CON20P_SFP: part number: CON20P_SFP-1367073-1
J8 = CON14P: part number: CON14P-MOLEX_87831
J9 = CON2P: part number: CON2P-MSTBA2,5/2-G-5,08
J10 = CON12P: part number: CON12P-TSM-106-01-S-DV
L1-L4 L9 = FERRITE: part number: FERRITE_C0805-LI0805H121R-10,LI0805H121R-10
L5-L8 = FERRITE: part number: FERRITE_SMD-220Z,ILBB_0603
LC1-LC3 = BNX02: part number: BNX022-01
LD1 LD2 LD5 = LED: part number: LED-HSMH-C150
LD3 = LED: part number: LED-HSMY-C150
LD4 LD6 LD7 = LED: part number: LED-HSMG-C150
LK1 LK1_1 LK2 LK2_1 LK3 LK3_1 LK4 LK4_1 LK5 LK5_1 LK6 LK6_1 LK7 LK7_1 LK8 LK8_1 LK9 LK9_1 LK10_1 LK11_1 LK12_1 LK13_1 LK14_1 LK15_1 LK16_1 LK17_1 LK18_1 LK19_1 LK20_1 LK21_1 LK22_1 LK23_1 LK24_1 LK25_1 LK26_1 LK27_1 LK28_1 LK29_1 LK30_1 LK31_1 LK32_1 LK33_1 LK34_1 LK35_1 LK36_1 LK37_1 LK38_1 LK39_1 LK40_1 LK41_1 LK42_1 LK43_1 LK44_1 LK45_1 LK46_1 LK47_1 LK48_1 LK49_1 LK50_1 LK51_1 LK52_1 LK53_1 LK54_1 LK55_1 LK56_1 LK57_1 LK58_1 LK59_1 LK60_1 LK61_1 LK62_1 LK63_1 LK64_1 LK65_1 LK66_1 LK67_1 LK68_1 = 1-HOLE: part number: 1-HOLE_0-8-BASE
QZ1 = OSC_8P_OE_CLKP_CLKN_SDA_SCL: part number: 570CAC000121DG
QZ2 = OSC_6P_VCTRL_ENDIS_OUT: part number: OSC_6P_VCTRL_ENDIS_OUT_124-CFPV-45,20.000MHZ
R1 R2 R6 R14_1 R17_1 R24_1 R78 = RSMD0402: part number: RSMD0402_1/16W-100,1%; tolerance: 1%
R1_1 R2_1 R4 R5 R18_1 R19_1 = RSMD0402: part number: RSMD0402_1/16W-51,1%; tolerance: 1%
R3 R25 R27 R29 R31 R33 R35 = RSMD0603: part number: RSMD0603_1/16W-2.4K,1%; tolerance: 1%
R3_1 R4_1 R5_1 R6_1 R7_1 R8_1 R9_1 R10_1 R11_1 R12_1 R13_1 R15_1 R16_1 = RSMD0402: part number: RSMD0402_1/16W-10R,5%; tolerance: 5%
R7 R48 R56-R60 R62 R67 = RSMD0603: part number: RSMD0603_1/10W-4.7K,1%; tolerance: 1%
R8 R9 R18 R19 R22-R24 R36 R37 R41 R42 = RSMD0603: part number: RSMD0603_1/10W-XX,1%; tolerance: 1%
R10 R38 R43 R72-R74 = RSMD0603: part number: RSMD0603_1/10W-100K,1%; tolerance: 1%
R11 = RSMD0603: part number: RSMD0603_1/16W-9K,1%; tolerance: 1%
R12 R40 R45 = RSMD0603: part number: RSMD0603_1/10W-390K,1%; tolerance: 1%
R13 = RSMD0402: part number: RSMD0402_1/16W-47K,1%; tolerance: 1%
R14-R16 = RSMD0603: part number: RSMD0603_1/10W-240,1%; tolerance: 1%
R17 = RSMD0603: part number: RSMD0603_1/10W-33,1%; tolerance: 1%
R20 R21 R54 R55 = RSMD0603: part number: RSMD0603_-00,
R20_1 R21_1 R22_1 R23_1 R25_1 R26_1 R28_1 R29_1 R30_1 R31_1 R32_1 R33_1 R34_1 R35_1 R36_1 R37_1 = RSMD0402: part number: RSMD0402_0.0625W-XX,1%; tolerance: 1%
R26 R28 R30 R32 R34 = RSMD0603: part number: RSMD0603_1/16W-1.2K,1%; tolerance: 1%
R27_1 = RSMD0402: part number: RSMD0402_1/16W-1K,5%; tolerance: 5%
R39 = RSMD0603: part number: RSMD0603_1/16W-40.2K,1%; tolerance: 1%
R42_1 = RSMD0603: part number: RSMD0603_1/10W-82,1%; tolerance: 1%
R44 = RSMD0603: part number: RSMD0603_1/10W-11K,1%; tolerance: 1%
R46 R47 R51 = RSMD0603: part number: RSMD0603_1/10W-120,1%; tolerance: 1%
R46_1 R47_1 = RSMD0402: part number: RSMD0402_1/16W-3.3R,5%; tolerance: 5%
R49 = RSMD0603: part number: RSMD0603_1/10W-270K,1%; tolerance: 1%
R50 = RSMD0603: part number: RSMD0603_1/10W-180,1%; tolerance: 1%
R52 R70 = RSMD0603: part number: RSMD0603_1/10W-150,1%; tolerance: 1%
R53 = RSMD0603: part number: RSMD0603_1/10W-51,1%; tolerance: 1%
R61 = RSMD0603: part number: RSMD0603_1/10W-330,1%; tolerance: 1%
R63 = RSMD0603: part number: RSMD0603_1/10W-2.4K,1%; tolerance: 1%
R64 R65 = RSMD0402: part number: RSMD0402_-00,
R66 = RSMD0603: part number: RSMD0603_1/10W-300K,1%; tolerance: 1%
R68 = RSMD0603: part number: RSMD0603_1/10W-36K,1%; tolerance: 1%
R69 = RSMD0603: part number: RSMD0603_1/10W-62K,1%; tolerance: 1%
R71 = RSMD0603: part number: RSMD0603_1/10W-3.3K,1%; tolerance: 1%
R75 R76 = RSMD0603: part number: RSMD0603_1/10W-100,1%; tolerance: 1%
R77 = RSMD0402: part number: RSMD0402_1/16W-33,1%; tolerance: 1%
R79 R80 = RSMD0805: part number: RSMD0805_-00,
REG1 = LT1585: part number: LT1585_TO263-3V3
REG3 = LT1585: part number: LT1585_TO263-ADJ
RG1 = LT3070: part number: LT3070EUFD#PBF
RG1_1 = LM2937IMP: part number: LM2937IMP_SOT223-2.5V,TI
RN1 RN2 RZ1 = R4ISMD: part number: R4ISMD_1206-150
RZ2 = R4ISMD: part number: R4ISMD_1206-4.7K
SFP1 SFP3 = SFP_CAGE: part number: SFP_CAGE-6367034-1
SFP2 SFP4 = SFP_CAGE: part number: SFP_CAGE-6367035-1
SW1 SW2 SW4 = SW_PUSHBUTTON_1SPSTA_4P: part number: SW_PUSHBUTTON_1SPSTA_4P_1-OMRON_B3SN-3012
SW3 = SW4INT: part number: SW4INT-1571983-4
U1 = OSC_VCXO_4P: part number: OSC_VCXO_4P_OSC_4PIN_53S-25MHZ,MERCURY
U1_1 = MAROC3: part number: MAROC3_PQFP-IN2P3
U2 = AD8031: part number: AD8031_SOT23-5-AD
U3 = PC049A_FPGA
U4 = MC100LVEL05: part number: MC100LVEL05_SOIC-ON SEMICONDUCTOR
U5 = SN65LVDS1: part number: SN65LVDS1_SOT23-5-TEXAS INSTRUMENTS
Z1 = LM4040: part number: LM4040-CIM3-2.5V,0.5%

## Footprints (pads in the part's own frame, mm; a bottom-side part is the same pattern mirrored in y, then rotated)
1-HOLE_0-8P
  round 1.372 hole 0.813: 1(0,0)
ARC241_SO8
  rect 0.508x0.813 smd: 1(0,0) 2(0.8,0) 3(1.6,0) 4(2.4,0) 5(2.4,1.505) 6(1.6,1.505) 7(0.8,1.505) 8(0,1.505)
BGA484C100P22X22_2300X2300X260
  round 1 smd: (-12.35,-12.35) (12.35,12.35)
  round 0.5 smd: A1(-10.5,10.5) A2(-9.5,10.5) A3(-8.5,10.5) A4(-7.5,10.5) A5(-6.5,10.5) A6(-5.5,10.5) A7(-4.5,10.5) A8(-3.5,10.5) A9(-2.5,10.5) A10(-1.5,10.5) A11(-0.5,10.5) A12(0.5,10.5) A13(1.5,10.5) A14(2.5,10.5) A15(3.5,10.5) A16(4.5,10.5) A17(5.5,10.5) A18(6.5,10.5) A19(7.5,10.5) A20(8.5,10.5) A21(9.5,10.5) A22(10.5,10.5) AA1(-10.5,-9.5) AA2(-9.5,-9.5) AA3(-8.5,-9.5) AA4(-7.5,-9.5) AA5(-6.5,-9.5) AA6(-5.5,-9.5) AA7(-4.5,-9.5) AA8(-3.5,-9.5) AA9(-2.5,-9.5) AA10(-1.5,-9.5) AA11(-0.5,-9.5) AA12(0.5,-9.5) AA13(1.5,-9.5) AA14(2.5,-9.5) AA15(3.5,-9.5) AA16(4.5,-9.5) AA17(5.5,-9.5) AA18(6.5,-9.5) AA19(7.5,-9.5) AA20(8.5,-9.5) AA21(9.5,-9.5) AA22(10.5,-9.5) AB1(-10.5,-10.5) AB2(-9.5,-10.5) AB3(-8.5,-10.5) AB4(-7.5,-10.5) AB5(-6.5,-10.5) AB6(-5.5,-10.5) AB7(-4.5,-10.5) AB8(-3.5,-10.5) AB9(-2.5,-10.5) AB10(-1.5,-10.5) AB11(-0.5,-10.5) AB12(0.5,-10.5) AB13(1.5,-10.5) AB14(2.5,-10.5) AB15(3.5,-10.5) AB16(4.5,-10.5) AB17(5.5,-10.5) AB18(6.5,-10.5) AB19(7.5,-10.5) AB20(8.5,-10.5) AB21(9.5,-10.5) AB22(10.5,-10.5) B1(-10.5,9.5) B2(-9.5,9.5) B3(-8.5,9.5) B4(-7.5,9.5) B5(-6.5,9.5) B6(-5.5,9.5) B7(-4.5,9.5) B8(-3.5,9.5) B9(-2.5,9.5) B10(-1.5,9.5) B11(-0.5,9.5) B12(0.5,9.5) B13(1.5,9.5) B14(2.5,9.5) B15(3.5,9.5) B16(4.5,9.5) B17(5.5,9.5) B18(6.5,9.5) B19(7.5,9.5) B20(8.5,9.5) B21(9.5,9.5) B22(10.5,9.5) C1(-10.5,8.5) C2(-9.5,8.5) C3(-8.5,8.5) C4(-7.5,8.5) C5(-6.5,8.5) C6(-5.5,8.5) C7(-4.5,8.5) C8(-3.5,8.5) C9(-2.5,8.5) C10(-1.5,8.5) C11(-0.5,8.5) C12(0.5,8.5) C13(1.5,8.5) C14(2.5,8.5) C15(3.5,8.5) C16(4.5,8.5) C17(5.5,8.5) C18(6.5,8.5) C19(7.5,8.5) C20(8.5,8.5) C21(9.5,8.5) C22(10.5,8.5) D1(-10.5,7.5) D2(-9.5,7.5) D3(-8.5,7.5) D4(-7.5,7.5) D5(-6.5,7.5) D6(-5.5,7.5) D7(-4.5,7.5) D8(-3.5,7.5) D9(-2.5,7.5) D10(-1.5,7.5) D11(-0.5,7.5) D12(0.5,7.5) D13(1.5,7.5) D14(2.5,7.5) D15(3.5,7.5) D16(4.5,7.5) D17(5.5,7.5) D18(6.5,7.5) D19(7.5,7.5) D20(8.5,7.5) D21(9.5,7.5) D22(10.5,7.5) E1(-10.5,6.5) E2(-9.5,6.5) E3(-8.5,6.5) E4(-7.5,6.5) E5(-6.5,6.5) E6(-5.5,6.5) E7(-4.5,6.5) E8(-3.5,6.5) E9(-2.5,6.5) E10(-1.5,6.5) E11(-0.5,6.5) E12(0.5,6.5) E13(1.5,6.5) E14(2.5,6.5) E15(3.5,6.5) E16(4.5,6.5) E17(5.5,6.5) E18(6.5,6.5) E19(7.5,6.5) E20(8.5,6.5) E21(9.5,6.5) E22(10.5,6.5) F1(-10.5,5.5) F2(-9.5,5.5) F3(-8.5,5.5) F4(-7.5,5.5) F5(-6.5,5.5) F6(-5.5,5.5) F7(-4.5,5.5) F8(-3.5,5.5) F9(-2.5,5.5) F10(-1.5,5.5) F11(-0.5,5.5) F12(0.5,5.5) F13(1.5,5.5) F14(2.5,5.5) F15(3.5,5.5) F16(4.5,5.5) F17(5.5,5.5) F18(6.5,5.5) F19(7.5,5.5) F20(8.5,5.5) F21(9.5,5.5) F22(10.5,5.5) G1(-10.5,4.5) G2(-9.5,4.5) G3(-8.5,4.5) G4(-7.5,4.5) G5(-6.5,4.5) G6(-5.5,4.5) G7(-4.5,4.5) G8(-3.5,4.5) G9(-2.5,4.5) G10(-1.5,4.5) G11(-0.5,4.5) G12(0.5,4.5) G13(1.5,4.5) G14(2.5,4.5) G15(3.5,4.5) G16(4.5,4.5) G17(5.5,4.5) G18(6.5,4.5) G19(7.5,4.5) G20(8.5,4.5) G21(9.5,4.5) G22(10.5,4.5) H1(-10.5,3.5) H2(-9.5,3.5) H3(-8.5,3.5) H4(-7.5,3.5) H5(-6.5,3.5) H6(-5.5,3.5) H7(-4.5,3.5) H8(-3.5,3.5) H9(-2.5,3.5) H10(-1.5,3.5) H11(-0.5,3.5) H12(0.5,3.5) H13(1.5,3.5) H14(2.5,3.5) H15(3.5,3.5) H16(4.5,3.5) H17(5.5,3.5) H18(6.5,3.5) H19(7.5,3.5) H20(8.5,3.5) H21(9.5,3.5) H22(10.5,3.5) J1(-10.5,2.5) J2(-9.5,2.5) J3(-8.5,2.5) J4(-7.5,2.5) J5(-6.5,2.5) J6(-5.5,2.5) J7(-4.5,2.5) J8(-3.5,2.5) J9(-2.5,2.5) J10(-1.5,2.5) J11(-0.5,2.5) J12(0.5,2.5) J13(1.5,2.5) J14(2.5,2.5) J15(3.5,2.5) J16(4.5,2.5) J17(5.5,2.5) J18(6.5,2.5) J19(7.5,2.5) J20(8.5,2.5) J21(9.5,2.5) J22(10.5,2.5) K1(-10.5,1.5) K2(-9.5,1.5) K3(-8.5,1.5) K4(-7.5,1.5) K5(-6.5,1.5) K6(-5.5,1.5) K7(-4.5,1.5) K8(-3.5,1.5) K9(-2.5,1.5) K10(-1.5,1.5) K11(-0.5,1.5) K12(0.5,1.5) K13(1.5,1.5) K14(2.5,1.5) K15(3.5,1.5) K16(4.5,1.5) K17(5.5,1.5) K18(6.5,1.5) K19(7.5,1.5) K20(8.5,1.5) K21(9.5,1.5) K22(10.5,1.5) L1(-10.5,0.5) L2(-9.5,0.5) L3(-8.5,0.5) L4(-7.5,0.5) L5(-6.5,0.5) L6(-5.5,0.5) L7(-4.5,0.5) L8(-3.5,0.5) L9(-2.5,0.5) L10(-1.5,0.5) L11(-0.5,0.5) L12(0.5,0.5) L13(1.5,0.5) L14(2.5,0.5) L15(3.5,0.5) L16(4.5,0.5) L17(5.5,0.5) L18(6.5,0.5) L19(7.5,0.5) L20(8.5,0.5) L21(9.5,0.5) L22(10.5,0.5) M1(-10.5,-0.5) M2(-9.5,-0.5) M3(-8.5,-0.5) M4(-7.5,-0.5) M5(-6.5,-0.5) M6(-5.5,-0.5) M7(-4.5,-0.5) M8(-3.5,-0.5) M9(-2.5,-0.5) M10(-1.5,-0.5) M11(-0.5,-0.5) M12(0.5,-0.5) M13(1.5,-0.5) M14(2.5,-0.5) M15(3.5,-0.5) M16(4.5,-0.5) M17(5.5,-0.5) M18(6.5,-0.5) M19(7.5,-0.5) M20(8.5,-0.5) M21(9.5,-0.5) M22(10.5,-0.5) N1(-10.5,-1.5) N2(-9.5,-1.5) N3(-8.5,-1.5) N4(-7.5,-1.5) N5(-6.5,-1.5) N6(-5.5,-1.5) N7(-4.5,-1.5) N8(-3.5,-1.5) N9(-2.5,-1.5) N10(-1.5,-1.5) N11(-0.5,-1.5) N12(0.5,-1.5) N13(1.5,-1.5) N14(2.5,-1.5) N15(3.5,-1.5) N16(4.5,-1.5) N17(5.5,-1.5) N18(6.5,-1.5) N19(7.5,-1.5) N20(8.5,-1.5) N21(9.5,-1.5) N22(10.5,-1.5) P1(-10.5,-2.5) P2(-9.5,-2.5) P3(-8.5,-2.5) P4(-7.5,-2.5) P5(-6.5,-2.5) P6(-5.5,-2.5) P7(-4.5,-2.5) P8(-3.5,-2.5) P9(-2.5,-2.5) P10(-1.5,-2.5) P11(-0.5,-2.5) P12(0.5,-2.5) P13(1.5,-2.5) P14(2.5,-2.5) P15(3.5,-2.5) P16(4.5,-2.5) P17(5.5,-2.5) P18(6.5,-2.5) P19(7.5,-2.5) P20(8.5,-2.5) P21(9.5,-2.5) P22(10.5,-2.5) R1(-10.5,-3.5) R2(-9.5,-3.5) R3(-8.5,-3.5) R4(-7.5,-3.5) R5(-6.5,-3.5) R6(-5.5,-3.5) R7(-4.5,-3.5) R8(-3.5,-3.5) R9(-2.5,-3.5) R10(-1.5,-3.5) R11(-0.5,-3.5) R12(0.5,-3.5) R13(1.5,-3.5) R14(2.5,-3.5) R15(3.5,-3.5) R16(4.5,-3.5) R17(5.5,-3.5) R18(6.5,-3.5) R19(7.5,-3.5) R20(8.5,-3.5) R21(9.5,-3.5) R22(10.5,-3.5) T1(-10.5,-4.5) T2(-9.5,-4.5) T3(-8.5,-4.5) T4(-7.5,-4.5) T5(-6.5,-4.5) T6(-5.5,-4.5) T7(-4.5,-4.5) T8(-3.5,-4.5) T9(-2.5,-4.5) T10(-1.5,-4.5) T11(-0.5,-4.5) T12(0.5,-4.5) T13(1.5,-4.5) T14(2.5,-4.5) T15(3.5,-4.5) T16(4.5,-4.5) T17(5.5,-4.5) T18(6.5,-4.5) T19(7.5,-4.5) T20(8.5,-4.5) T21(9.5,-4.5) T22(10.5,-4.5) U1(-10.5,-5.5) U2(-9.5,-5.5) U3(-8.5,-5.5) U4(-7.5,-5.5) U5(-6.5,-5.5) U6(-5.5,-5.5) U7(-4.5,-5.5) U8(-3.5,-5.5) U9(-2.5,-5.5) U10(-1.5,-5.5) U11(-0.5,-5.5) U12(0.5,-5.5) U13(1.5,-5.5) U14(2.5,-5.5) U15(3.5,-5.5) U16(4.5,-5.5) U17(5.5,-5.5) U18(6.5,-5.5) U19(7.5,-5.5) U20(8.5,-5.5) U21(9.5,-5.5) U22(10.5,-5.5) V1(-10.5,-6.5) V2(-9.5,-6.5) V3(-8.5,-6.5) V4(-7.5,-6.5) V5(-6.5,-6.5) V6(-5.5,-6.5) V7(-4.5,-6.5) V8(-3.5,-6.5) V9(-2.5,-6.5) V10(-1.5,-6.5) V11(-0.5,-6.5) V12(0.5,-6.5) V13(1.5,-6.5) V14(2.5,-6.5) V15(3.5,-6.5) V16(4.5,-6.5) V17(5.5,-6.5) V18(6.5,-6.5) V19(7.5,-6.5) V20(8.5,-6.5) V21(9.5,-6.5) V22(10.5,-6.5) W1(-10.5,-7.5) W2(-9.5,-7.5) W3(-8.5,-7.5) W4(-7.5,-7.5) W5(-6.5,-7.5) W6(-5.5,-7.5) W7(-4.5,-7.5) W8(-3.5,-7.5) W9(-2.5,-7.5) W10(-1.5,-7.5) W11(-0.5,-7.5) W12(0.5,-7.5) W13(1.5,-7.5) W14(2.5,-7.5) W15(3.5,-7.5) W16(4.5,-7.5) W17(5.5,-7.5) W18(6.5,-7.5) W19(7.5,-7.5) W20(8.5,-7.5) W21(9.5,-7.5) W22(10.5,-7.5) Y1(-10.5,-8.5) Y2(-9.5,-8.5) Y3(-8.5,-8.5) Y4(-7.5,-8.5) Y5(-6.5,-8.5) Y6(-5.5,-8.5) Y7(-4.5,-8.5) Y8(-3.5,-8.5) Y9(-2.5,-8.5) Y10(-1.5,-8.5) Y11(-0.5,-8.5) Y12(0.5,-8.5) Y13(1.5,-8.5) Y14(2.5,-8.5) Y15(3.5,-8.5) Y16(4.5,-8.5) Y17(5.5,-8.5) Y18(6.5,-8.5) Y19(7.5,-8.5) Y20(8.5,-8.5) Y21(9.5,-8.5) Y22(10.5,-8.5)
C0402
  rect 0.6x0.6 smd: 1(-0.45,0) 2(0.45,0)
C0603
  rect 0.9x1 smd: 1(-0.75,0) 2(0.75,0)
C0805
  rect 1.2x1.4 smd: 1(-0.9,0) 2(0.9,0)
C1206
  rect 1.3x1.8 smd: 1(-1.5,0) 2(1.5,0)
C1210
  rect 1.2x2.7 smd: 1(-1.5,0) 2(1.5,0)
C7343POL
  rect 2.032x3.175 smd: 1(0,0) 2(6,0)
CAPC3225X279N
  rect 1.15x2.7 smd: 1(-1.5,0) 2(1.5,0)
CON2MC_508
  round 2.032 hole 1.499: 1(0,0) 2(0,-5.08)
CON14MD_2MM
  round 1.524 hole 0.914: 1(0,0) 2(2,0) 3(0,-2) 4(2,-2) 5(0,-4) 6(2,-4) 7(0,-6) 8(2,-6) 9(0,-8) 10(2,-8) 11(0,-10) 12(2,-10) 13(0,-12) 14(2,-12)
CON150_QTSDA
  round 1.6 hole 1.016: (-1.054,-56.861) (-1.054,1.622)
  rect 1.448x0.406 smd: 1(0,0) 2(-6.17,0) 3(0,-0.635) 4(-6.17,-0.635) 5(0,-1.27) 6(-6.17,-1.27) 7(0,-1.905) 8(-6.17,-1.905) 9(0,-2.54) 10(-6.17,-2.54) 11(0,-3.175) 12(-6.17,-3.175) 13(0,-3.81) 14(-6.17,-3.81) 15(0,-4.445) 16(-6.17,-4.445) 17(0,-5.08) 18(-6.17,-5.08) 19(0,-5.715) 20(-6.17,-5.715) 21(0,-6.35) 22(-6.17,-6.35) 23(0,-6.985) 24(-6.17,-6.985) 25(0,-7.62) 26(-6.17,-7.62) 27(0,-8.255) 28(-6.17,-8.255) 29(0,-8.89) 30(-6.17,-8.89) 31(0,-9.525) 32(-6.17,-9.525) 33(0,-10.16) 34(-6.17,-10.16) 35(0,-10.795) 36(-6.17,-10.795) 37(0,-11.43) 38(-6.17,-11.43) 39(0,-12.065) 40(-6.17,-12.065) 41(0,-12.7) 42(-6.17,-12.7) 43(0,-13.335) 44(-6.17,-13.335) 45(0,-13.97) 46(-6.17,-13.97) 47(0,-14.605) 48(-6.17,-14.605) 49(0,-15.24) 50(-6.17,-15.24) 51(0,-20) 52(-6.17,-20) 53(0,-20.635) 54(-6.17,-20.635) 55(0,-21.27) 56(-6.17,-21.27) 57(0,-21.905) 58(-6.17,-21.905) 59(0,-22.54) 60(-6.17,-22.54) 61(0,-23.175) 62(-6.17,-23.175) 63(0,-23.81) 64(-6.17,-23.81) 65(0,-24.445) 66(-6.17,-24.445) 67(0,-25.08) 68(-6.17,-25.08) 69(0,-25.715) 70(-6.17,-25.715) 71(0,-26.35) 72(-6.17,-26.35) 73(0,-26.985) 74(-6.17,-26.985) 75(0,-27.62) 76(-6.17,-27.62) 77(0,-28.255) 78(-6.17,-28.255) 79(0,-28.89) 80(-6.17,-28.89) 81(0,-29.525) 82(-6.17,-29.525) 83(0,-30.16) 84(-6.17,-30.16) 85(0,-30.795) 86(-6.17,-30.795) 87(0,-31.43) 88(-6.17,-31.43) 89(0,-32.065) 90(-6.17,-32.065) 91(0,-32.7) 92(-6.17,-32.7) 93(0,-33.335) 94(-6.17,-33.335) 95(0,-33.97) 96(-6.17,-33.97) 97(0,-34.605) 98(-6.17,-34.605) 99(0,-35.24) 100(-6.17,-35.24) 101(0,-40) 102(-6.17,-40) 103(0,-40.635) 104(-6.17,-40.635) 105(0,-41.27) 106(-6.17,-41.27) 107(0,-41.905) 108(-6.17,-41.905) 109(0,-42.54) 110(-6.17,-42.54) 111(0,-43.175) 112(-6.17,-43.175) 113(0,-43.81) 114(-6.17,-43.81) 115(0,-44.445) 116(-6.17,-44.445) 117(0,-45.08) 118(-6.17,-45.08) 119(0,-45.715) 120(-6.17,-45.715) 121(0,-46.35) 122(-6.17,-46.35) 123(0,-46.985) 124(-6.17,-46.985) 125(0,-47.62) 126(-6.17,-47.62) 127(0,-48.255) 128(-6.17,-48.255) 129(0,-48.89) 130(-6.17,-48.89) 131(0,-49.525) 132(-6.17,-49.525) 133(0,-50.16) 134(-6.17,-50.16) 135(0,-50.795) 136(-6.17,-50.795) 137(0,-51.43) 138(-6.17,-51.43) 139(0,-52.065) 140(-6.17,-52.065) 141(0,-52.7) 142(-6.17,-52.7) 143(0,-53.335) 144(-6.17,-53.335) 145(0,-53.97) 146(-6.17,-53.97) 147(0,-54.605) 148(-6.17,-54.605) 149(0,-55.24) 150(-6.17,-55.24)
  rect 0.635x2.54 smd: 151(-3.086,0.826) 154(-3.086,-16.066) 155(-3.086,-19.174) 158(-3.086,-36.066) 159(-3.086,-39.174) 162(-3.086,-56.066)
  rect 0.635x4.699 smd: 152(-3.086,-4.445) 153(-3.086,-10.795) 156(-3.086,-24.445) 157(-3.086,-30.795) 160(-3.086,-44.445) 161(-3.086,-50.795)
CONHE13D3X1M
  round 1.524 hole 0.914: 1(0,0) 2(2.54,0) 3(5.08,0)
D1206
  rect 1.016x1.778 smd: 1(0,0) 2(3.2,0)
HARTING_0903196X921
  round 5 hole 2.8: 1(2.54,5.08) 2(2.54,-83.82)
  round 1.7 hole 1: A1(0,0) A2(0,-2.54) A3(0,-5.08) A4(0,-7.62) A5(0,-10.16) A6(0,-12.7) A7(0,-15.24) A8(0,-17.78) A9(0,-20.32) A10(0,-22.86) A11(0,-25.4) A12(0,-27.94) A13(0,-30.48) A14(0,-33.02) A15(0,-35.56) A16(0,-38.1) A17(0,-40.64) A18(0,-43.18) A19(0,-45.72) A20(0,-48.26) A21(0,-50.8) A22(0,-53.34) A23(0,-55.88) A24(0,-58.42) A25(0,-60.96) A26(0,-63.5) A27(0,-66.04) A28(0,-68.58) A29(0,-71.12) A30(0,-73.66) A31(0,-76.2) A32(0,-78.74) B1(-2.54,0) B2(-2.54,-2.54) B3(-2.54,-5.08) B4(-2.54,-7.62) B5(-2.54,-10.16) B6(-2.54,-12.7) B7(-2.54,-15.24) B8(-2.54,-17.78) B9(-2.54,-20.32) B10(-2.54,-22.86) B11(-2.54,-25.4) B12(-2.54,-27.94) B13(-2.54,-30.48) B14(-2.54,-33.02) B15(-2.54,-35.56) B16(-2.54,-38.1) B17(-2.54,-40.64) B18(-2.54,-43.18) B19(-2.54,-45.72) B20(-2.54,-48.26) B21(-2.54,-50.8) B22(-2.54,-53.34) B23(-2.54,-55.88) B24(-2.54,-58.42) B25(-2.54,-60.96) B26(-2.54,-63.5) B27(-2.54,-66.04) B28(-2.54,-68.58) B29(-2.54,-71.12) B30(-2.54,-73.66) B31(-2.54,-76.2) B32(-2.54,-78.74) C1(-5.08,0) C2(-5.08,-2.54) C3(-5.08,-5.08) C4(-5.08,-7.62) C5(-5.08,-10.16) C6(-5.08,-12.7) C7(-5.08,-15.24) C8(-5.08,-17.78) C9(-5.08,-20.32) C10(-5.08,-22.86) C11(-5.08,-25.4) C12(-5.08,-27.94) C13(-5.08,-30.48) C14(-5.08,-33.02) C15(-5.08,-35.56) C16(-5.08,-38.1) C17(-5.08,-40.64) C18(-5.08,-43.18) C19(-5.08,-45.72) C20(-5.08,-48.26) C21(-5.08,-50.8) C22(-5.08,-53.34) C23(-5.08,-55.88) C24(-5.08,-58.42) C25(-5.08,-60.96) C26(-5.08,-63.5) C27(-5.08,-66.04) C28(-5.08,-68.58) C29(-5.08,-71.12) C30(-5.08,-73.66) C31(-5.08,-76.2) C32(-5.08,-78.74)
HARTING_09732966801
  round 5 hole 2.8: 1(2.54,5.08) 2(2.54,-83.82)
  round 1.7 hole 1: A1(0,0) A2(0,-2.54) A3(0,-5.08) A4(0,-7.62) A5(0,-10.16) A6(0,-12.7) A7(0,-15.24) A8(0,-17.78) A9(0,-20.32) A10(0,-22.86) A11(0,-25.4) A12(0,-27.94) A13(0,-30.48) A14(0,-33.02) A15(0,-35.56) A16(0,-38.1) A17(0,-40.64) A18(0,-43.18) A19(0,-45.72) A20(0,-48.26) A21(0,-50.8) A22(0,-53.34) A23(0,-55.88) A24(0,-58.42) A25(0,-60.96) A26(0,-63.5) A27(0,-66.04) A28(0,-68.58) A29(0,-71.12) A30(0,-73.66) A31(0,-76.2) A32(0,-78.74) B1(-2.54,0) B2(-2.54,-2.54) B3(-2.54,-5.08) B4(-2.54,-7.62) B5(-2.54,-10.16) B6(-2.54,-12.7) B7(-2.54,-15.24) B8(-2.54,-17.78) B9(-2.54,-20.32) B10(-2.54,-22.86) B11(-2.54,-25.4) B12(-2.54,-27.94) B13(-2.54,-30.48) B14(-2.54,-33.02) B15(-2.54,-35.56) B16(-2.54,-38.1) B17(-2.54,-40.64) B18(-2.54,-43.18) B19(-2.54,-45.72) B20(-2.54,-48.26) B21(-2.54,-50.8) B22(-2.54,-53.34) B23(-2.54,-55.88) B24(-2.54,-58.42) B25(-2.54,-60.96) B26(-2.54,-63.5) B27(-2.54,-66.04) B28(-2.54,-68.58) B29(-2.54,-71.12) B30(-2.54,-73.66) B31(-2.54,-76.2) B32(-2.54,-78.74) C1(-5.08,0) C2(-5.08,-2.54) C3(-5.08,-5.08) C4(-5.08,-7.62) C5(-5.08,-10.16) C6(-5.08,-12.7) C7(-5.08,-15.24) C8(-5.08,-17.78) C9(-5.08,-20.32) C10(-5.08,-22.86) C11(-5.08,-25.4) C12(-5.08,-27.94) C13(-5.08,-30.48) C14(-5.08,-33.02) C15(-5.08,-35.56) C16(-5.08,-38.1) C17(-5.08,-40.64) C18(-5.08,-43.18) C19(-5.08,-45.72) C20(-5.08,-48.26) C21(-5.08,-50.8) C22(-5.08,-53.34) C23(-5.08,-55.88) C24(-5.08,-58.42) C25(-5.08,-60.96) C26(-5.08,-63.5) C27(-5.08,-66.04) C28(-5.08,-68.58) C29(-5.08,-71.12) C30(-5.08,-73.66) C31(-5.08,-76.2) C32(-5.08,-78.74)
